# EAGLE board Печатная плата управляющая (EAGLE 9.0.0)
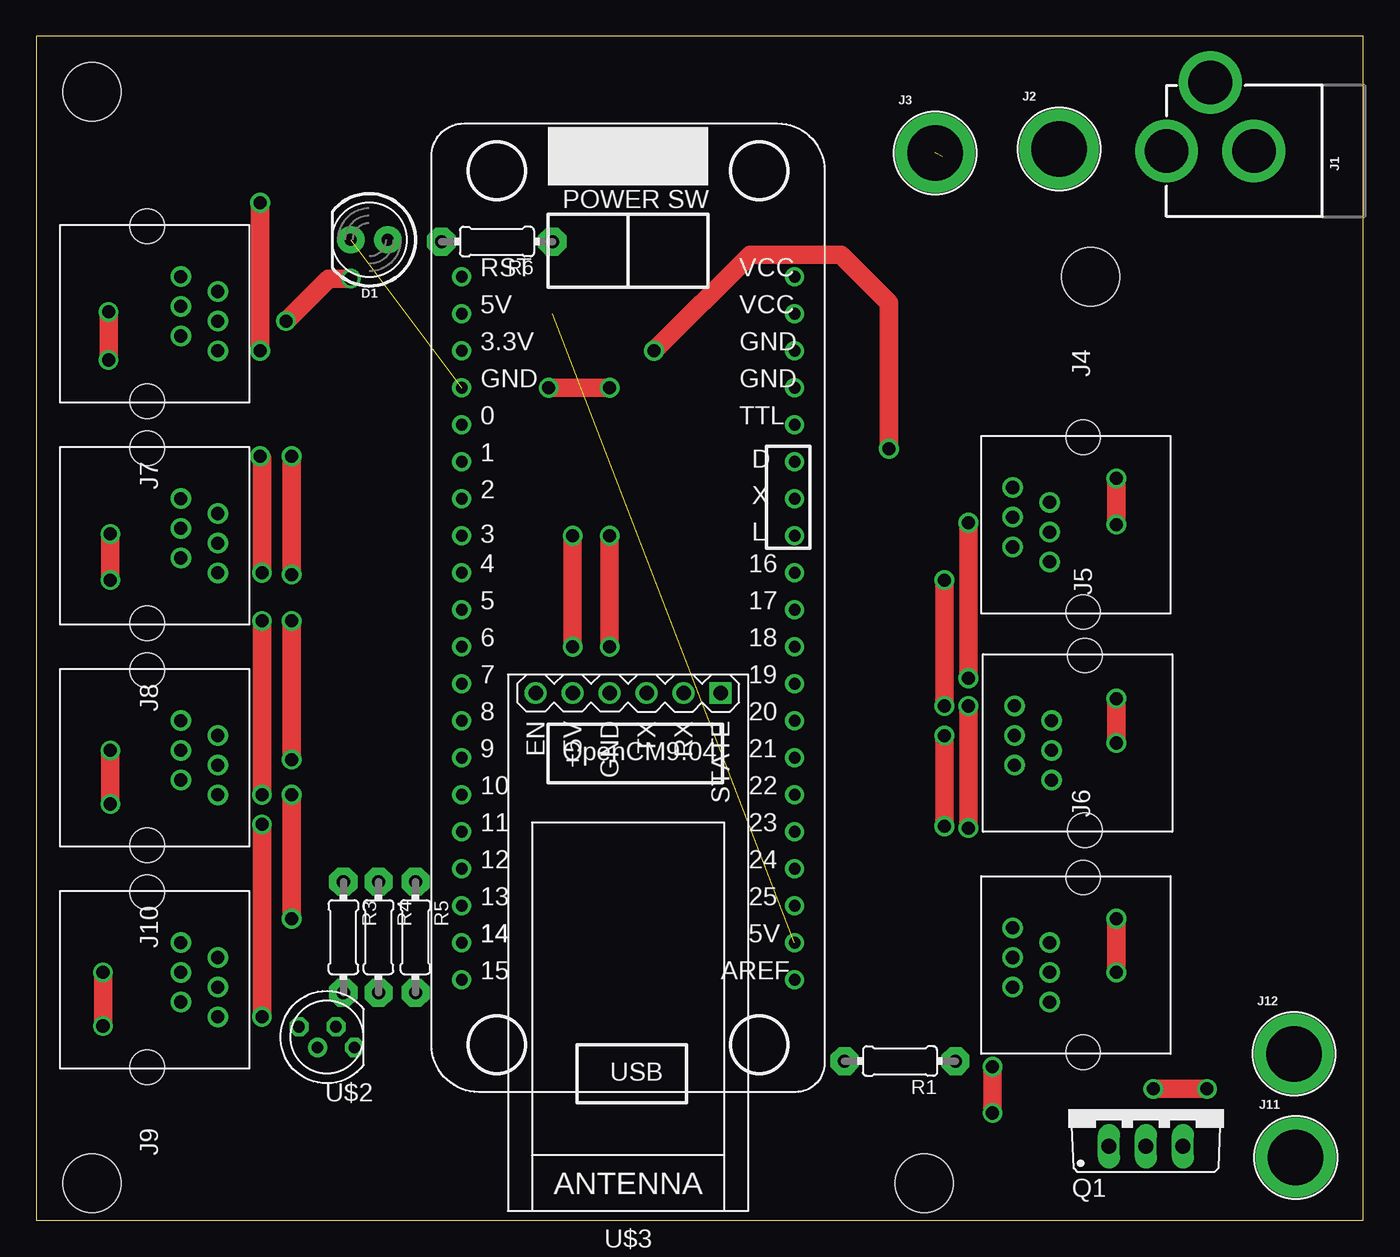
[diagram p0: board, top side]
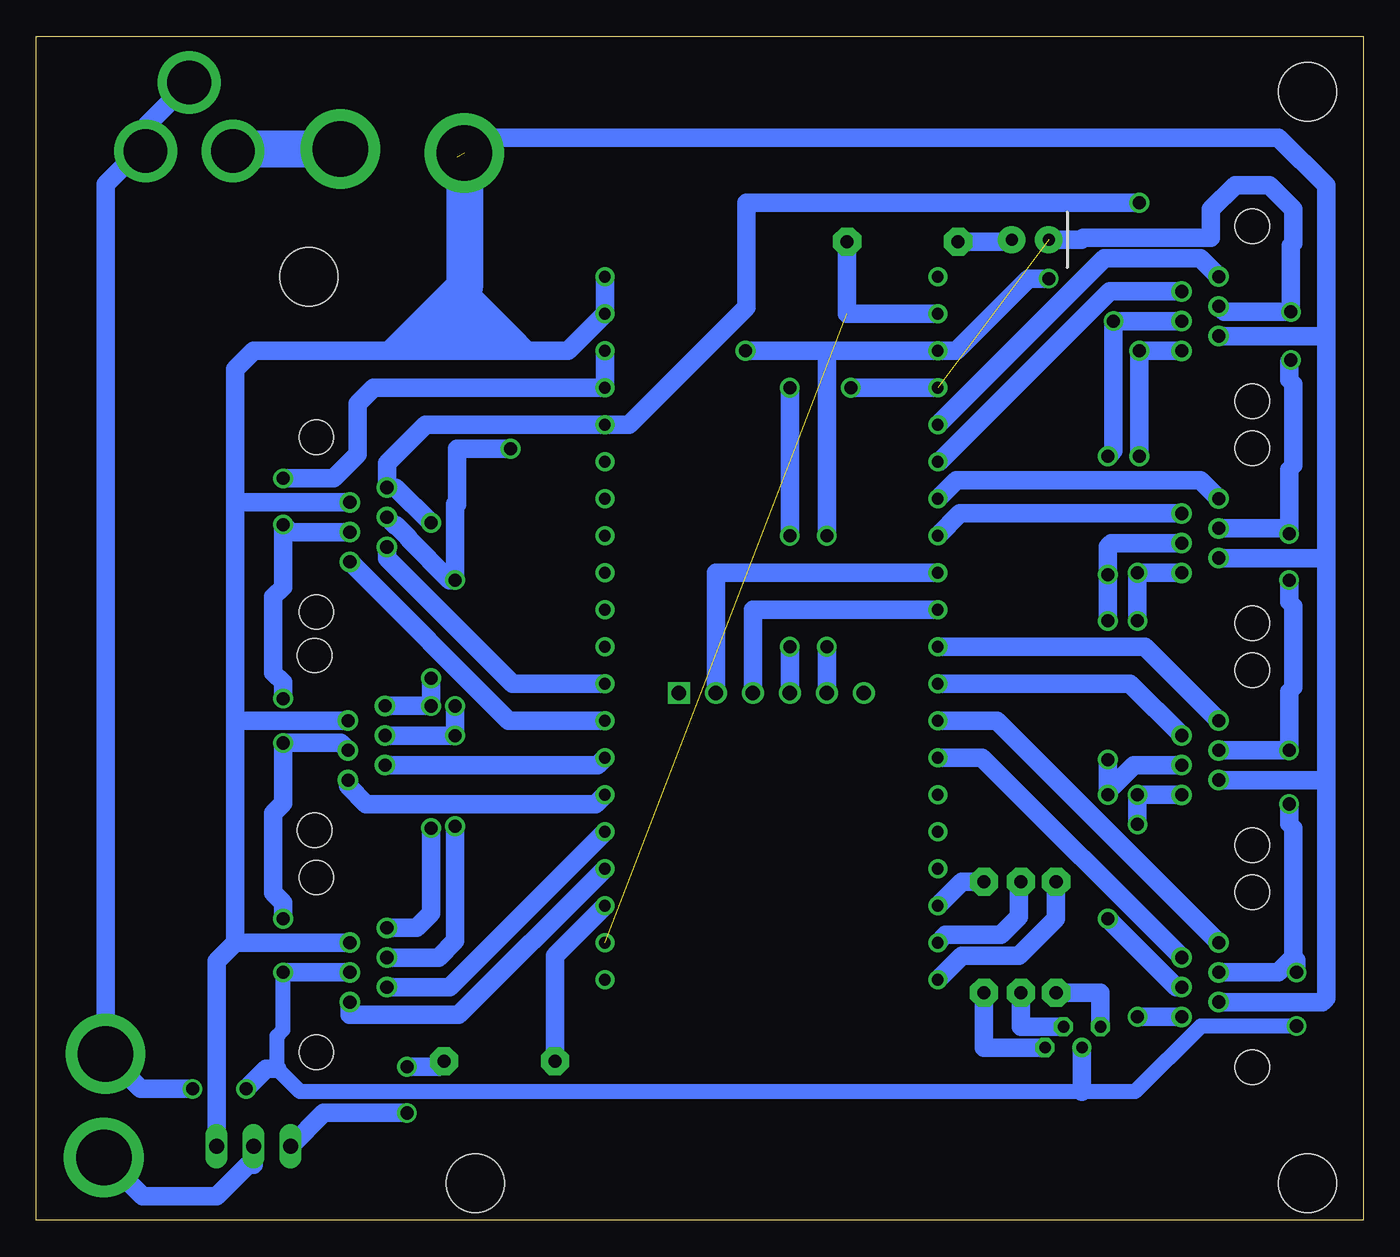
[diagram p1: board, bottom side, seen from below]

Size 91.11 x 81.27 mm. Coordinates in mm from the lower left corner, seen from the top.
Outline: 0,0 91.11,0 91.11,81.27 0,81.27 0,0
Copper layers (1*16): Top 0.035mm / dielectric 1.5mm / Bottom 0.035mm
Design rules "default": minimum track width 6mil, minimum drill 0.35mm, track to track 6mil, track to pad 6mil, pad to pad 6mil, via to via 6mil, smd to smd 6mil, copper to edge 40mil, drill to drill 6mil, minimum pad ring 10mil, minimum via ring 8mil, stop-mask expansion 4mil, vias tented up to drill 0mil, thermal gap 10mil
Holes 4 mm at 3.81,77.47 72.39,64.77 60.96,2.54 3.81,2.54

## Footprints (pad centres in the part's own frame; a part is rotated, then mirrored left to right if it is on the bottom)
LED_5MM = drill 0.813 pad 1.88: A -1.27,0; K 1.27,0
POWER_JACK_PTH = drill 2.997 pad 4.318: GND 0,7.7; GNDBREAK 4.7,10.7; PWR 0,13.7
BANANA_CONN = drill 3.81 pad 5.461: P$1 0,0
615006138421 = drill 0.9: 1 2.55,4.84; 2 1.53,2.3; 3 0.51,4.84; 4 -0.51,2.3; 5 -1.53,4.84; 6 -2.55,2.3 | hole 2.36: -6,0; 6,0
TO220BV = drill 1.016 long: D 0,-2.54; G -2.54,-2.54; S 2.54,-2.54
0204/7 = drill 0.9 pad 1.93 octagon: 1 -3.81,0; 2 3.81,0
OPENCM9.04 = drill 0.8: 0 -11.43,12.7; 1 -11.43,10.16; 2 -11.43,7.62; 3 -11.43,5.08; 3.3V -11.43,17.78; 4 -11.43,2.54; 5 -11.43,0; 5V -11.43,20.32; 5V2 11.43,-22.86; 6 -11.43,-2.54; 7 -11.43,-5.08; 8 -11.43,-7.62; 9 -11.43,-10.16; 10 -11.43,-12.7; 11 -11.43,-15.24; 12 -11.43,-17.78; 13 -11.43,-20.32; 14 -11.43,-22.86; 15 -11.43,-25.4; 16 11.43,2.54; 17 11.43,0; 18 11.43,-2.54; 19 11.43,-5.08; 20 11.43,-7.62; 21 11.43,-10.16; 22 11.43,-12.7; 23 11.43,-15.24; 24 11.43,-17.78; 25 11.43,-20.32; AREF 11.43,-25.4; D 11.43,10.16; GND -11.43,15.24; GND2 11.43,17.78; GND3 11.43,15.24; L 11.43,5.08; RST -11.43,22.86; TTL 11.43,12.7; VCC 11.43,22.86; VCC2 11.43,20.32; X 11.43,7.62
LED5MMRGB = drill 0.8 pad 0.813 octagon: P$1 -1.905,0.714; P$2 -0.635,-0.714; P$4 1.905,-0.714 | drill 0.8 pad 0.813: P$3 0.635,0.714
WIRELESS-BLUETOOTH-HC-05 = drill 1 square: 1 -6.35,-17.145 | drill 1: 2 -3.81,-17.145; 3 -1.27,-17.145; 4 1.27,-17.145; 5 3.81,-17.145; 6 6.35,-17.145

## Placement (x,y rotation side)
D1  [LED_5MM]  22.86,67.31 180 top
J1  POWER_JACK  [POWER_JACK_PTH]  91.31,73.41 90 top
J2  [BANANA_CONN]  70.23,73.53 0 top
J3  [BANANA_CONN]  61.72,73.28 0 top
J4  [615006138421]  71.88,47.75 90 top
J5  [615006138421]  72.01,32.77 90 top
J6  [615006138421]  71.88,17.53 90 top
J7  [615006138421]  7.62,62.23 270 top
J8  [615006138421]  7.62,46.99 270 top
J9  [615006138421]  7.62,16.51 270 top
J10  [615006138421]  7.62,31.75 270 top
J11  [BANANA_CONN]  86.49,4.32 0 top
J12  [BANANA_CONN]  86.36,11.43 0 top
Q1  IRF540  [TO220BV]  76.2,7.62 0 top
R1  100  [0204/7]  59.31,10.92 180 top
R3  330  [0204/7]  21.08,19.43 270 top
R4  330  [0204/7]  23.5,19.43 270 top
R5  330  [0204/7]  26.04,19.43 270 top
R6  330  [0204/7]  31.62,67.18 180 top
U$1  OPENCM9.04  [OPENCM9.04]  40.64,41.91 0 top
U$2  5MMRGBLED  [LED5MMRGB]  19.94,12.57 180 top
U$3  WIRELESS-BLUETOOTH-HC-05  [WIRELESS-BLUETOOTH-HC-05]  40.64,19.05 180 top

## Library data of the parts
D1 = SparkFun-LED
J1 = SparkFun-Connectors; PROD_ID: CONN-08197
J2 J3 J11 J12 = SparkFun-Connectors
J4-J10 = Wurth_Elektronik_Electromechanic_Input-Output_Connectors_rev16a
Q1 = transistor-power
R1 R3-R6 = resistor
U$1 = OpenCM9.04
U$2 = led_rgb
U$3 = diy-modules

## Nets
3.3V: J4.3 J5.3 J6.3 J7.3 J8.3 J9.3 J10.3 U$1.3.3V U$3.5
5V: R6.1 U$1.5V U$1.5V2
12V: J3.P$1 J4.2 J5.2 J6.2 J7.2 J8.2 J9.2 J10.2 Q1.S U$1.VCC U$1.VCC2
BLUE: R5.1 U$1.13
ENCODER_X_1: J4.6 U$1.20
ENCODER_X_2: J5.6 U$1.22
ENCODER_Y: J6.6 U$1.24
ENCODER_Z_1: J7.6 U$1.0
ENCODER_Z_2: J8.6 U$1.2
ENCODER_Z_3: J10.6 U$1.6
ENCODER_Z_4: J9.6 U$1.8
ENDSTOP_X_1: J4.5 U$1.19
ENDSTOP_X_2: J5.5 U$1.21
ENDSTOP_Y: J6.5 U$1.23
ENDSTOP_Z_1: J7.5 U$1.1
ENDSTOP_Z_2: J8.5 U$1.3
ENDSTOP_Z_3: J10.5 U$1.7
ENDSTOP_Z_4: J9.5 U$1.9
GND: D1.K J1.GND J1.GNDBREAK J4.4 J5.4 J6.4 J7.4 J8.4 J9.4 J10.4 J12.P$1 U$1.GND U$1.GND2 U$1.GND3 U$2.P$3 U$3.4
GREEN: R4.1 U$1.14
N$1: J11.P$1 Q1.D
N$2: R4.2 U$2.P$2
N$3: Q1.G R1.1
N$4: R5.2 U$2.P$1
N$5: R3.2 U$2.P$4
N$6: D1.A R6.2
N$7: J1.PWR J2.P$1
PUMP: R1.2 U$1.25
RED: R3.1 U$1.15
RX2: U$1.5 U$3.3
RX/TX: J4.1 J5.1 J6.1 J7.1 J8.1 J9.1 J10.1 U$1.TTL
TX2: U$1.4 U$3.2

## Tracks (layer width: path | path; a pad name or v marks a point on that pad's centre or on a via)
3.3V  (via drill 0.9)
  Top 1.27: v17.53,20.7 v17.53,29.21 | v17.53,41.15 v17.53,31.62 | v17.53,44.32 v17.53,52.45 | v21.59,64.64 20.07,64.64 v17.14,61.72 | v62.36,33.27 v62.36,27.05 | v62.36,43.94 v62.36,35.31 | v42.42,59.69 49.02,66.29 55.25,66.29 58.55,62.99 v58.55,52.96 | v36.83,46.99 v36.83,39.37
  Bottom 1.27: v17.53,20.7 12.82,16 J9.3 | J10.3 15.75,31.24 17.53,29.46 | 17.53,29.46 v17.53,29.21 | v17.53,31.62 17.53,29.46 | J8.3 17.27,46.48 17.53,46.23 v17.53,44.32 v17.53,41.15 | J7.3 v17.14,61.72 17.14,52.83 v17.53,52.45 | v21.59,64.64 22.99,64.64 27.94,59.69 U$1.3.3V 36.83,59.69 | v62.36,27.05 62.36,19.18 63.5,18.03 63.5,18.04 J6.3 | J5.3 v62.36,33.27 v62.36,35.31 | J4.3 66.49,47.71 66.42,47.71 65.55,46.84 65.55,46.77 62.72,43.94 v62.36,43.94 62.36,49.15 62.23,49.15 62.23,52.96 v58.55,52.96 | 36.83,59.69 v42.42,59.69 | 36.83,59.69 v36.83,46.99 | v36.83,39.37 U$3.5
5V  (1 unrouted)
  Bottom 1.27: R6.1 35.43,62.23 U$1.5V
12V  (1 unrouted)
  Bottom 1.27: J9.2 2.8,14.98 2.54,15.24 2.54,30.48 | J10.2 2.8,30.22 2.54,30.48 | 2.54,30.48 2.54,45.46 | 2.54,45.46 J8.2 | 2.54,45.46 2.54,60.7 | 2.54,60.7 J7.2 | J6.2 77.47,19.05 | 77.47,19.05 77.47,34.29 | 77.47,34.29 77.46,34.3 J5.2 | J4.2 77.47,49.28 | 77.47,49.28 77.47,34.29 | U$1.VCC U$1.VCC2 54.61,59.69 57.4,59.69 | 57.4,59.69 58.42,59.69 | 58.42,59.69 59.69,59.69 | 59.69,59.69 60.96,59.69 | 60.96,59.69 62.23,59.69 | 62.23,59.69 63.5,59.69 | 63.5,59.69 64.77,59.69 | 64.77,59.69 66.93,59.69 | 66.93,59.69 76.2,59.69 77.47,58.42 77.47,49.28 | 77.47,19.05 78.74,17.78 Q1.S | 64.77,59.69 64.77,60.96 63.5,59.69 | 62.87,61.59 62.87,60.33 62.23,59.69 | 62.87,62.86 62.87,61.59 | 62.87,61.59 62.23,60.96 | 62.23,60.96 60.96,59.69 | 61.72,64.01 58.42,60.71 | 58.42,60.71 58.42,59.69 | 58.42,59.69 59.69,60.96 | 62.23,62.23 60.96,62.23 59.69,60.96 | 59.69,60.96 59.69,59.69 | 59.69,59.69 60.96,60.96 62.23,60.96 | 66.93,59.69 62.48,64.14 | 58.42,60.71 57.4,59.69 | 62.23,73.03 60.94,74.32 5.82,74.32 2.54,71.04 2.54,60.7
  Bottom 2.54: J3.P$1 61.72,64.01 62.87,62.86 64.77,60.96
BLUE
  Bottom 1.27: U$1.13 27.56,23.24 R5.1
ENCODER_X_1
  Bottom 1.27: J4.6 58.67,34.29 U$1.20
ENCODER_X_2
  Bottom 1.27: U$1.22 52.71,28.57 68.45,28.57 69.71,29.83 J5.6
ENCODER_Y
  Bottom 1.27: U$1.24 62.1,14.1 69.6,14.1 69.6,14.96 J6.6
ENCODER_Z_1
  Bottom 1.27: J7.6 11.18,66.04 17.78,66.04 U$1.0
ENCODER_Z_2
  Bottom 1.27: J8.6 11.18,50.8 27.94,50.8 U$1.2
ENCODER_Z_3
  Bottom 1.27: J10.6 14.99,39.37 U$1.6
ENCODER_Z_4
  Bottom 1.27: J9.6 20.2,29.34 | 20.2,29.34 25.15,34.29 U$1.8 | 20.2,29.34
ENDSTOP_X_1
  Bottom 1.27: U$1.19 58.42,36.83 67.04,45.45 J4.5
ENDSTOP_X_2
  Bottom 1.27: J5.5 52.58,31.24 U$1.21
ENDSTOP_Y
  Bottom 1.27: U$1.23 62.74,16 J6.5
ENDSTOP_Z_1
  Bottom 1.27: J7.5 17.39,63.76 29.08,52.07 U$1.1
ENDSTOP_Z_2
  Bottom 1.27: J8.5 27.68,48.52 U$1.3
ENDSTOP_Z_3
  Bottom 1.27: J10.5 16.01,36.83 U$1.7
ENDSTOP_Z_4
  Bottom 1.27: J9.5 26.17,31.75 U$1.9
GND  (via drill 0.9)  (1 unrouted)
  Top 1.27: v4.95,62.36 v4.95,59.05 | v5.08,47.12 v5.08,43.94 | v5.08,32.26 v5.08,28.57 | v74.17,50.93 v74.17,47.75 | v74.17,35.81 v74.17,32.77 | v74.17,20.7 v74.17,17.02 | v4.57,17.02 v4.57,13.33 | v76.71,9.02 v80.39,9.02 | v39.37,46.99 v39.37,39.37 | v35.18,57.15 v39.37,57.15
  Bottom 1.016: v4.57,13.33 11.15,13.33 15.67,8.82 19.3,8.82 73,8.82 74.59,10.41 74.59,12.65 74.17,13.06 v74.17,17.02
  Bottom 1.27: J9.4 5.84,17.02 4.79,18.07 | v5.08,28.57 5.08,27.21 4.79,26.92 4.79,18.07 | J10.4 v5.08,32.26 5.08,36.29 4.79,36.58 4.79,42.16 5.08,42.45 v5.08,43.94 | v4.95,59.05 5.08,58.93 5.08,57.69 4.79,57.4 4.79,51.82 5.08,51.53 v5.08,47.12 5.46,47.5 J8.4 | J7.4 9.54,62.36 v4.95,62.36 4.95,66.89 4.79,67.06 4.79,69.4 6.45,71.06 8.79,71.06 10.45,69.4 10.45,67.46 19.2,67.46 19.36,67.31 D1.K | J6.4 v74.17,17.02 | v74.17,20.7 74.17,21.81 74.84,22.48 74.84,27.94 74.17,28.61 v74.17,32.77 70.22,32.77 J5.4 | v74.17,35.81 74.17,36.92 74.84,37.59 74.84,42.8 74.17,43.47 v74.17,47.75 73.66,47.24 J4.4 | v74.17,50.93 73.06,50.93 73.05,50.92 70.71,50.92 69.05,52.58 69.05,56.04 67.94,57.15 U$1.GND3 U$1.GND2 | v4.57,17.02 4.57,17.85 4.79,18.07 | 74.59,10.41 75.32,10.41 v76.71,9.02 | v80.39,9.02 83.95,9.02 J12.P$1 86.36,71.12 83.82,73.66 83.61,73.45 J1.GND 83.61,75.11 J1.GNDBREAK | v39.37,39.37 U$3.4 | U$1.GND v35.18,57.15 | v39.37,57.15 v39.37,46.99 | U$2.P$3 19.3,8.82
GREEN
  Bottom 1.27: R4.1 23.62,23.11 23.62,20.83 24.87,19.58 28.68,19.58 U$1.14
N$1
  Bottom 1.27: Q1.D 76.2,3.81 76.58,3.81 78.74,1.65 83.82,1.65 J11.P$1
N$2
  Bottom 1.27: U$2.P$2 23.5,13.29 R4.2
N$3  (via drill 0.9)
  Top 1.27: v65.66,10.54 v65.66,7.37
  Bottom 1.27: R1.1 63.5,10.54 v65.66,10.54 | v65.66,7.37 71.37,7.37 Q1.G
N$4
  Bottom 1.27: U$2.P$1 26.04,11.86 R5.2
N$5
  Bottom 1.27: U$2.P$4 18.03,15.62 R3.2
N$6
  Bottom 1.27: D1.A 24.13,67.18 R6.2
N$7
  Bottom 2.54: J2.P$1 77.49,73.53 J1.PWR
PUMP
  Bottom 1.27: U$1.25 55.5,18.16 R1.2
RED
  Bottom 1.27: R3.1 21.08,20.7 23.62,18.16 27.56,18.16 U$1.15
RX2
  Bottom 1.27: U$3.3 41.91,41.91 U$1.5
RX/TX  (via drill 0.9)
  Top 1.27: v15.49,27.18 v15.49,13.97 | v15.49,41.15 v15.49,29.21 | v15.49,44.45 15.49,52.32 v15.37,52.45 | v15.37,69.85 v15.37,59.69 | v64.01,35.31 v64.01,26.92 | v64.01,37.21 v64.01,47.88
  Bottom 1.27: J10.1 v15.49,29.21 v15.49,27.18 | J9.1 v15.49,13.97 | J8.1 v15.49,44.45 v15.49,41.15 | J7.1 15.23,59.68 15.24,59.69 v15.37,59.69 v15.37,52.45 | J6.1 65.01,20.08 64.01,21.08 v64.01,26.92 | J5.1 67.16,35.31 v64.01,35.31 v64.01,37.21 | v64.01,47.88 66.43,50.3 J4.1 67.04,51.96 64.39,54.61 U$1.TTL 50.42,54.61 42.35,62.67 42.35,69.85 v15.37,69.85
TX2
  Bottom 1.27: U$1.4 44.45,44.45 U$3.2